# EAGLE board ESpdesign (EAGLE 9.6.2)
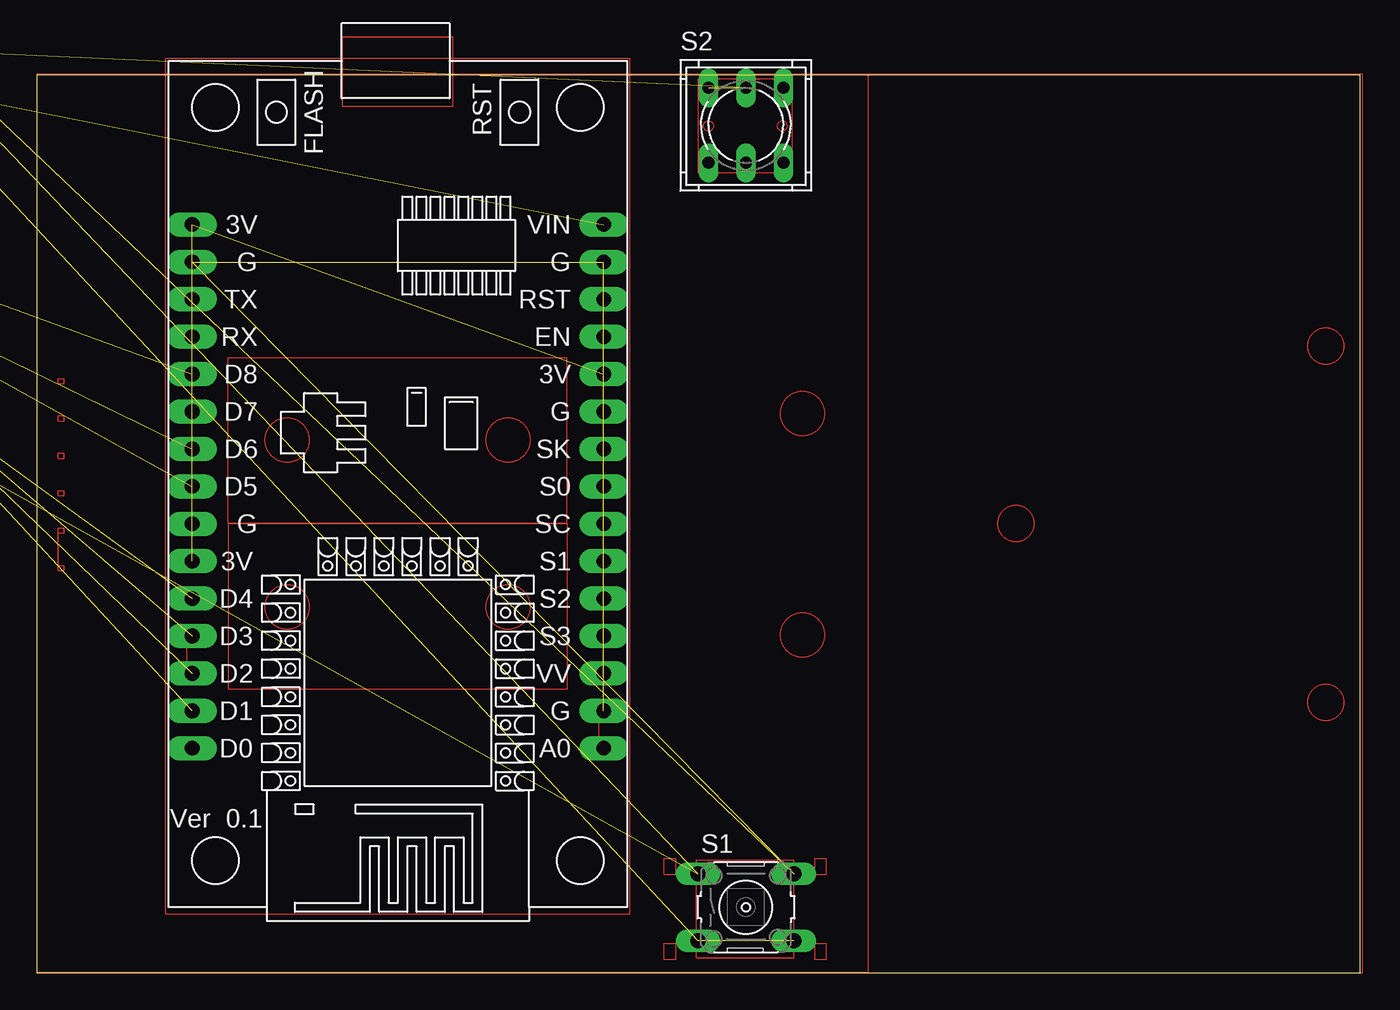
[diagram p0: board, top side]

Size 89.84 x 60.95 mm. Coordinates in mm from the lower left corner, seen from the top.
Outline: 0,0 89.84,0 89.84,60.95 0,60.95 0,0
Copper layers (1*16): Top 0.035mm / dielectric 1.5mm / Bottom 0.035mm
Design rules "default": minimum track width 6mil, minimum drill 0.35mm, track to track 6mil, track to pad 6mil, pad to pad 6mil, via to via 6mil, smd to smd 6mil, copper to edge 40mil, drill to drill 6mil, minimum pad ring 10mil, minimum via ring 8mil, stop-mask expansion 4mil, vias tented up to drill 0mil, thermal gap 10mil

## Footprints (pad centres in the part's own frame; a part is rotated, then mirrored left to right if it is on the bottom)
1X02 = drill 1.016 long: 1 -1.27,0; 2 1.27,0
B3F-10XX = drill 1.016 long: 1 -3.251,2.261; 2 3.251,2.261; 3 -3.251,-2.261; 4 3.251,-2.261
9077-2 = drill 0.813 long: 1 -2.54,2.54; 2 0,2.54; 3 2.54,2.54; 4 -2.54,-2.54; 5 0,-2.54; 6 2.54,-2.54
MA03-1 = drill 1.016 long: 1 -2.54,0; 2 0,0; 3 2.54,0
NODEMCU = drill 1 pad 1.676 long: 1 -13.97,17.78; 2 -13.97,15.24; 3 -13.97,12.7; 4 -13.97,10.16; 5 -13.97,7.62; 6 -13.97,5.08; 7 -13.97,2.54; 8 -13.97,0; 9 -13.97,-2.54; 10 -13.97,-5.08; 11 -13.97,-7.62; 12 -13.97,-10.16; 13 -13.97,-12.7; 14 -13.97,-15.24; 15 -13.97,-17.78; 16 13.97,-17.78; 17 13.97,-15.24; 18 13.97,-12.7; 19 13.97,-10.16; 20 13.97,-7.62; 21 13.97,-5.08; 22 13.97,-2.54; 23 13.97,0; 24 13.97,2.54; 25 13.97,5.08; 26 13.97,7.62; 27 13.97,10.16; 28 13.97,12.7; 29 13.97,15.24; 30 13.97,17.78

## Placement (x,y rotation side)
JP1  [1X02]  -26.67,63.5 0 top  (outside the outline)
S1  [B3F-10XX]  48.13,4.45 0 top
S2  9077-2  [9077-2]  48.13,57.53 0 top
SV1  [MA03-1]  -34.29,63.5 0 top  (outside the outline)
SV2  [MA03-1]  -44.45,63.5 0 top  (outside the outline)
SV3  [MA03-1]  -54.61,63.5 0 top  (outside the outline)
SV4  [MA03-1]  -17.78,72.39 0 top  (outside the outline)
U$1  NODEMCU  [NODEMCU]  24.51,33.02 180 top

## Library data of the parts
JP1 = pinhead
S1 = switch-omron; MPN: B3F-1000; OC_FARNELL: 176432; OC_NEWARK: 36M3542
S2 = switch-misc-edited
SV1-SV4 = con-lstb; OC_FARNELL: unknown; OC_NEWARK: unknown
U$1 = nodemcu

## Nets
3V: U$1.11 U$1.16 U$1.25
5V: JP1.2 SV3.2 U$1.15
B-: S1.3 S1.4 SV4.1
D1: SV1.3 U$1.29
D2: SV1.2 U$1.28
D3: SV1.1 U$1.27
D4: SV2.3 U$1.26
D5: SV2.2 U$1.23
D6: SV2.1 U$1.22
D7: U$1.21
D8: SV3.3 U$1.20
GND: S1.1 S1.2 SV3.1 SV4.2 U$1.2 U$1.10 U$1.14 U$1.17 U$1.24
P+: JP1.1 S2.1 S2.2 SV4.3

## Tracks (layer width: path | path; a pad name or v marks a point on that pad's centre or on a via)
3V  (2 unrouted)
5V  (2 unrouted)
B-  (2 unrouted)
D1  (1 unrouted)
D2  (1 unrouted)
D3  (1 unrouted)
D4  (1 unrouted)
D5  (1 unrouted)
D6  (1 unrouted)
D8  (1 unrouted)
GND  (8 unrouted)
N$1
  Top 0.001: 56.46,0 0,0 0,61 56.46,61 | 56.46,0 56.46,61 | 56.46,0 90,0 90,61 56.46,61
N$2
  Top 0.001: 36,30.45 13,30.45 13,19.25 36,19.25 36,30.45
N$3
  Top 0.001: 13,30.55 36,30.55 36,41.75 13,41.75 13,30.55
N$5
  Top 0.001: 1.45,27.66 1.45,27.3 1.85,27.3 1.85,27.66 1.45,27.66 | 1.45,29.84 1.45,30.2 1.85,30.2 1.85,29.84 1.45,29.84 | 1.45,27.66 1.45,29.84
N$6
  Top 0.001: 44.91,54.31 51.29,54.31 51.29,60.69 44.91,60.69 44.91,54.31
N$7
  Top 0.001: 1.45,32.38 1.45,32.73 1.85,32.73 1.85,32.38 1.45,32.38
N$8
  Top 0.001: 1.45,34.92 1.45,35.27 1.85,35.27 1.85,34.92 1.45,34.92
N$9
  Top 0.001: 1.45,37.47 1.45,37.81 1.85,37.81 1.85,37.47 1.45,37.47
N$10
  Top 0.001: 1.45,40.01 1.45,40.35 1.85,40.35 1.85,40.01 1.45,40.01
N$12
  Top 0.001: 38.15,15.58 38.15,14.94 38.79,14.94 38.79,15.58 38.15,15.58 | 38.15,17.48 38.15,18.12 38.79,18.12 38.79,17.48 38.15,17.48 | 38.15,15.58 38.15,17.48
N$13
  Top 0.001: 38.15,20.02 38.15,20.66 38.79,20.66 38.79,20.02 38.15,20.02
N$14
  Top 0.001: 38.15,22.56 38.15,23.2 38.79,23.2 38.79,22.56 38.15,22.56
N$15
  Top 0.001: 38.15,25.1 38.15,25.74 38.79,25.74 38.79,25.1 38.15,25.1
N$16
  Top 0.001: 38.15,27.64 38.15,28.28 38.79,28.28 38.79,27.64 38.15,27.64
N$17
  Top 0.001: 38.15,30.18 38.15,30.82 38.79,30.82 38.79,30.18 38.15,30.18
N$18
  Top 0.001: 38.15,32.72 38.15,33.36 38.79,33.36 38.79,32.72 38.15,32.72
N$19
  Top 0.001: 38.15,35.26 38.15,35.9 38.79,35.9 38.79,35.26 38.15,35.26
N$20
  Top 0.001: 38.15,37.8 38.15,38.44 38.79,38.44 38.79,37.8 38.15,37.8
N$21
  Top 0.001: 38.15,40.34 38.15,40.98 38.79,40.98 38.79,40.34 38.15,40.34
N$22
  Top 0.001: 38.15,42.88 38.15,43.52 38.79,43.52 38.79,42.88 38.15,42.88
N$23
  Top 0.001: 38.15,45.42 38.15,46.06 38.79,46.06 38.79,45.42 38.15,45.42
N$24
  Top 0.001: 38.15,47.96 38.15,48.6 38.79,48.6 38.79,47.96 38.15,47.96
N$25
  Top 0.001: 38.15,50.5 38.15,51.14 38.79,51.14 38.79,50.5 38.15,50.5
N$27
  Top 0.001: 42.58,0.92 43.37,0.92 43.37,2 42.58,2 42.58,0.92
N$28
  Top 0.001: 42.58,6.68 43.37,6.68 43.37,7.76 42.58,7.76 42.58,6.68
N$29
  Top 0.001: 52.82,0.92 53.62,0.92 53.62,2 52.82,2 52.82,0.92
N$30
  Top 0.001: 52.82,6.68 53.62,6.68 53.62,7.76 52.82,7.76 52.82,6.68
N$31
  Top 0.001: 44.79,1.03 51.41,1.03 51.41,7.65 44.79,7.65 44.79,1.03
N$32
  Top 0.001: 10.21,20.66 10.21,20.02 10.85,20.02 10.85,20.66 10.21,20.66 | 10.21,22.56 10.21,23.2 10.85,23.2 10.85,22.56 10.21,22.56 | 10.21,20.66 10.21,22.56
N$33
  Top 0.001: 10.21,25.1 10.21,25.74 10.85,25.74 10.85,25.1 10.21,25.1
N$34
  Top 0.001: 10.21,27.64 10.21,28.28 10.85,28.28 10.85,27.64 10.21,27.64
N$35
  Top 0.001: 10.21,30.18 10.21,30.82 10.85,30.82 10.85,30.18 10.21,30.18
N$36
  Top 0.001: 10.21,32.72 10.21,33.36 10.85,33.36 10.85,32.72 10.21,32.72
N$37
  Top 0.001: 10.21,35.26 10.21,35.9 10.85,35.9 10.85,35.26 10.21,35.26
N$38
  Top 0.001: 10.21,37.8 10.21,38.44 10.85,38.44 10.85,37.8 10.21,37.8
N$39
  Top 0.001: 10.21,40.34 10.21,40.98 10.85,40.98 10.85,40.34 10.21,40.34
N$40
  Top 0.001: 20.75,58.84 28.25,58.84 28.25,63.54 20.75,63.54 20.75,58.84
N$41
  Top 0.001: 8.75,3.99 40.25,3.99 40.25,62.09 8.75,62.09 8.75,3.99
P+  (3 unrouted)
(copper drawn outside any net)
  shapes: Top circle x15